# Altium PCB eciot-2.4G-PCB-ANT.PcbDoc
Units mm, origin at the board's own origin, x right, y up, seen from the top; angles counter-clockwise.
Board outline 106 x 76.82 mm, 2 copper layers (Top Layer, Bottom Layer); 25 components, 0 nets, 142 pads, 20 vias.
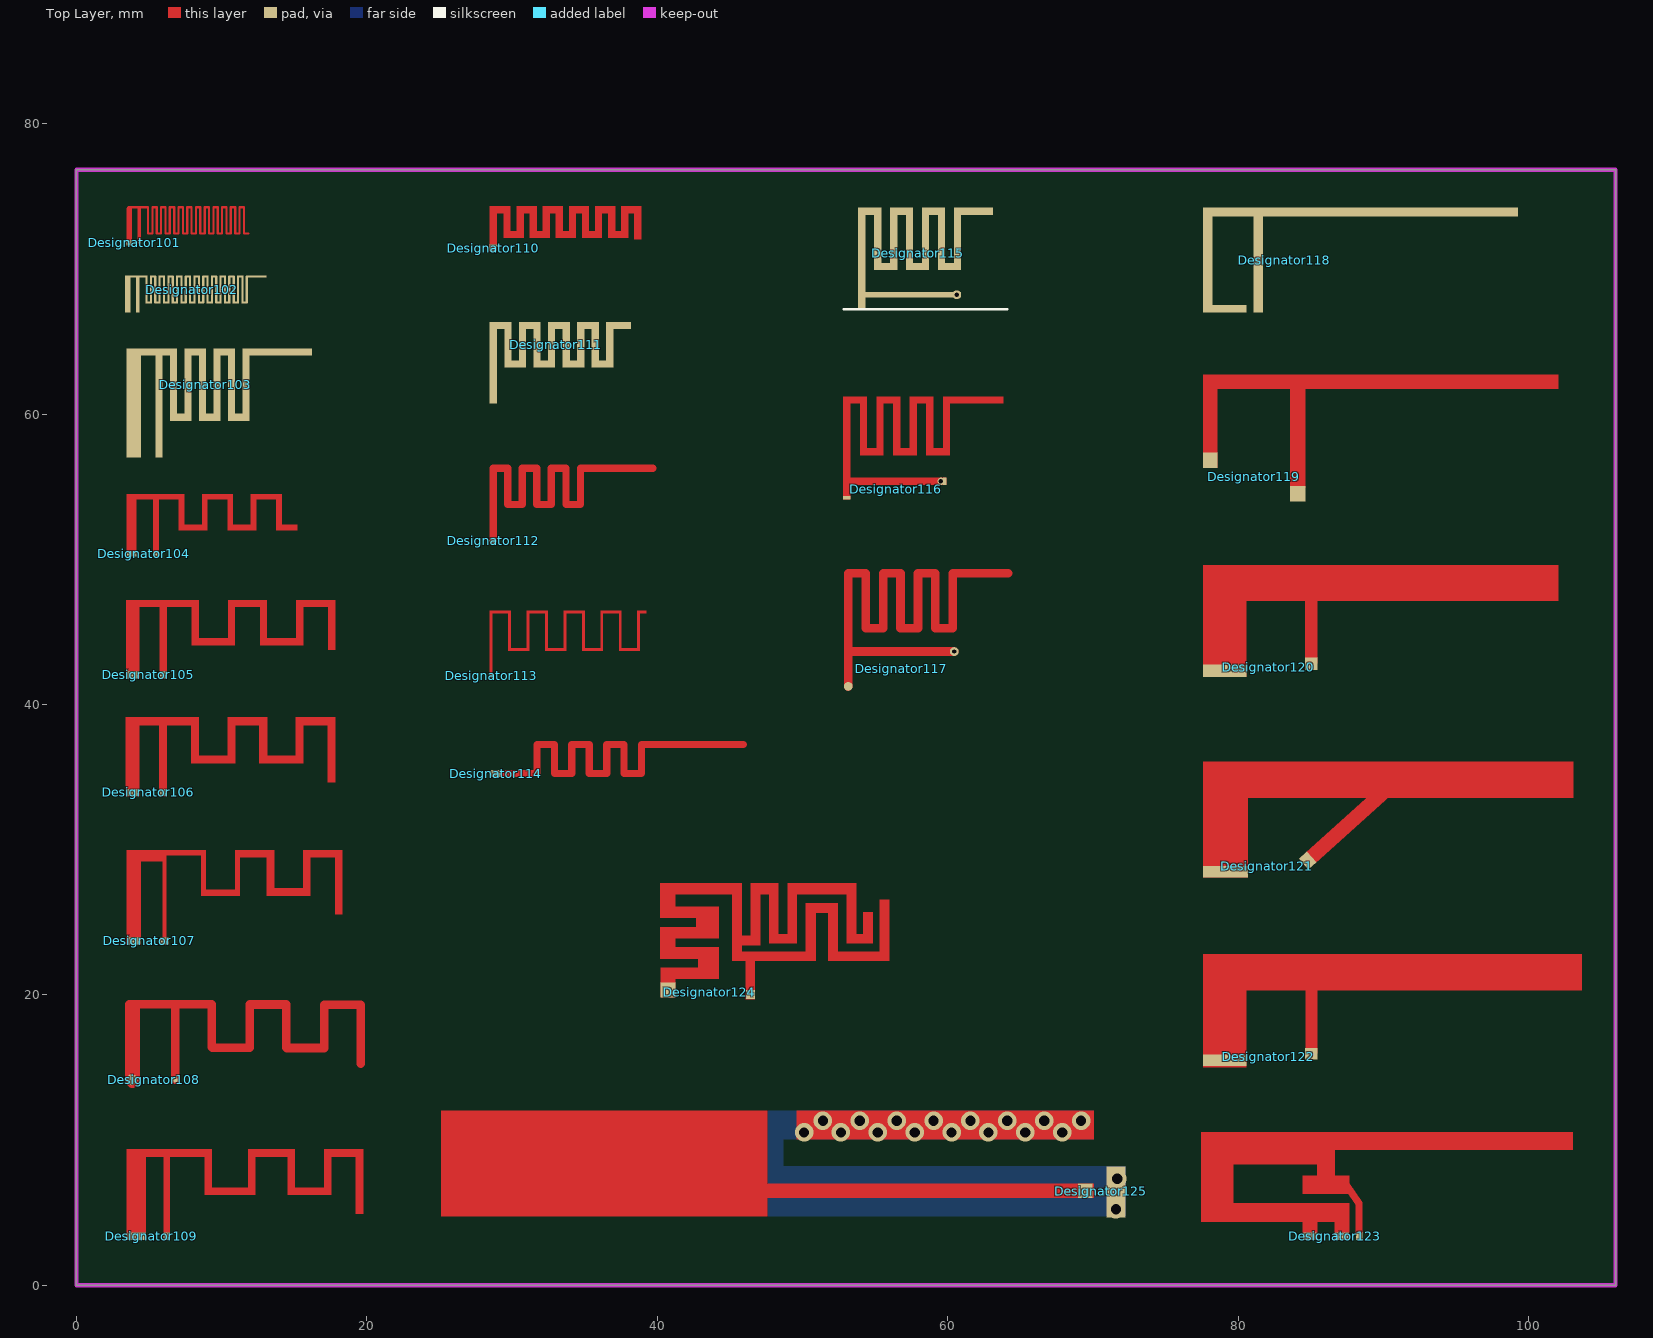
[diagram p0: Top Layer view]
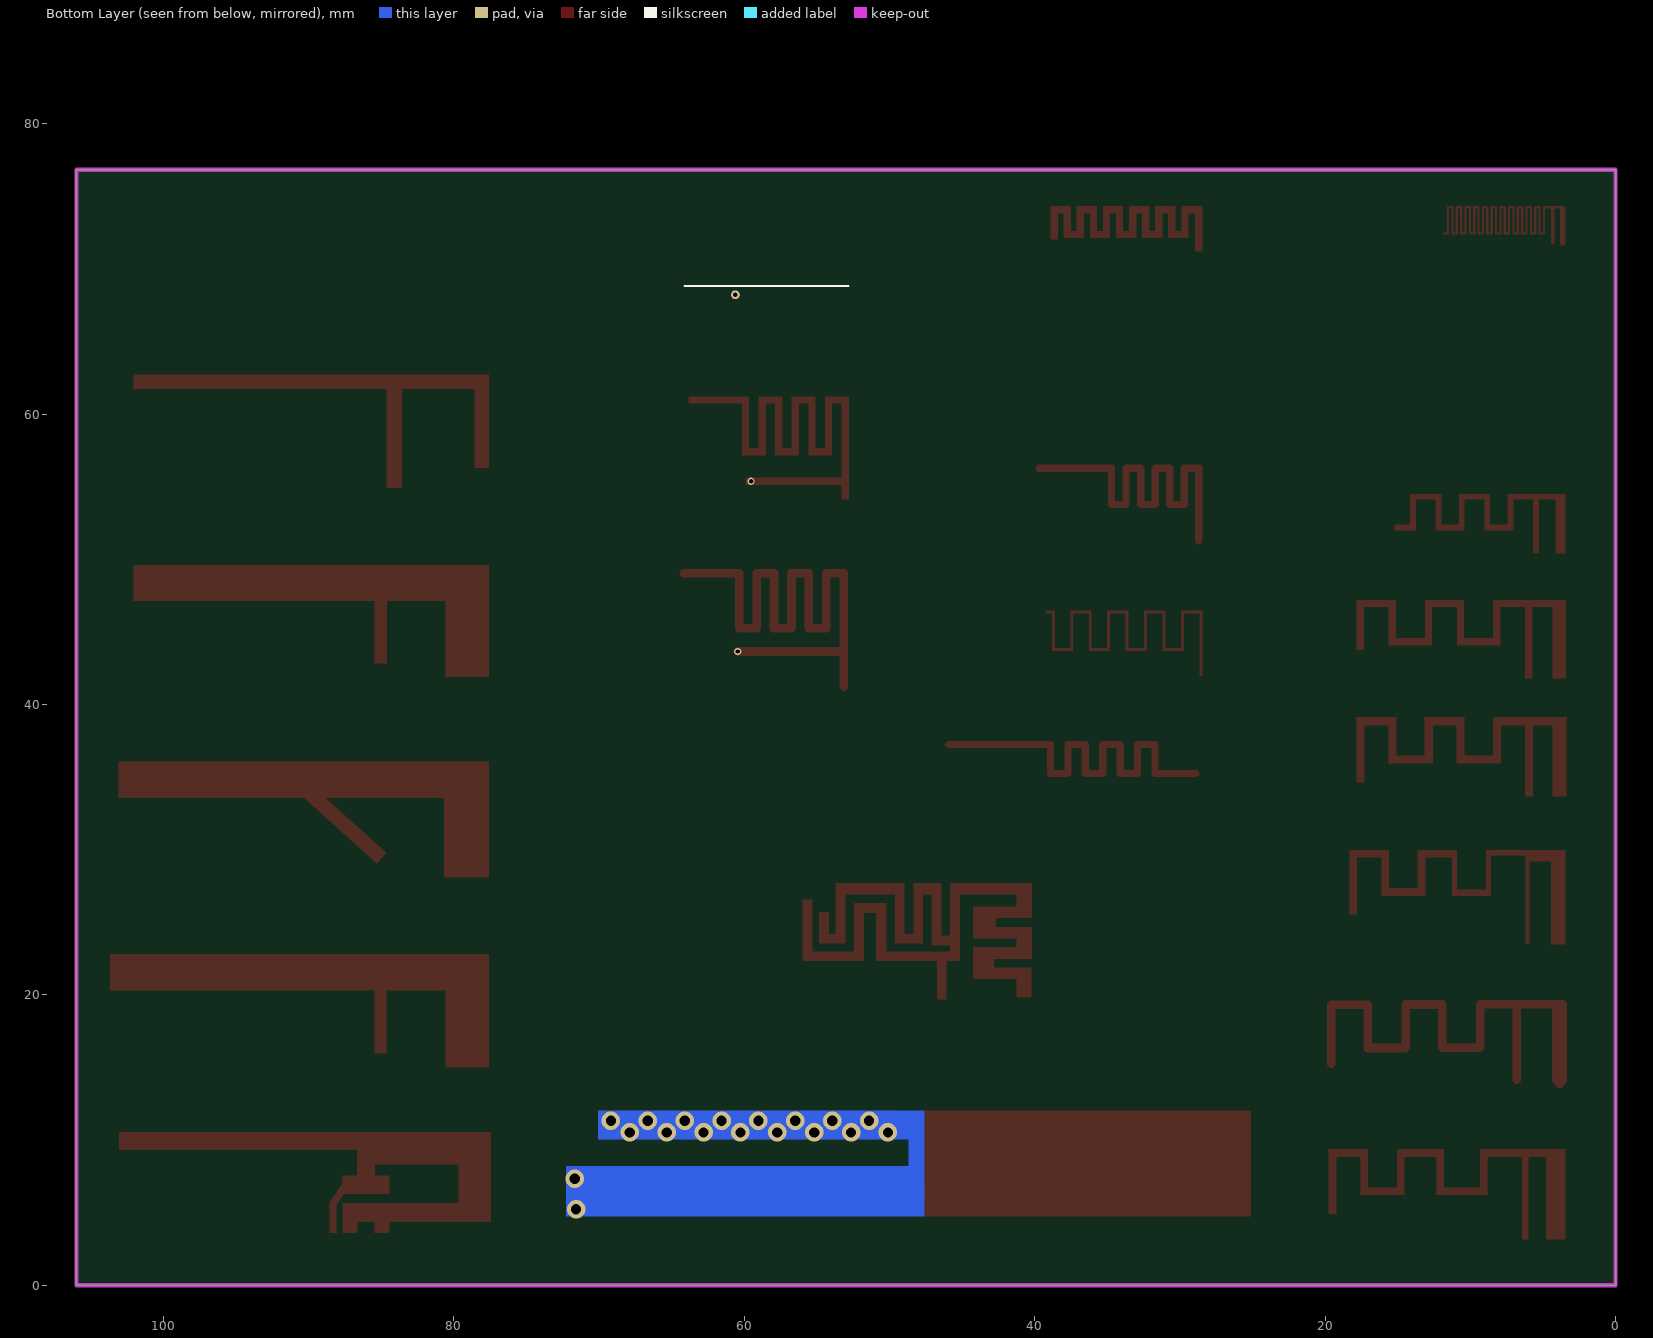
[diagram p1: Bottom Layer view, seen from below]

## Layer stack, top to bottom
Top Solder: solder mask 0.0102, Solder Resist, Dk 3.5
Top Layer: signal copper 0.0356
Dielectric 1: dielectric 0.32, FR-4, Dk 4.8
Bottom Layer: signal copper 0.0356
Bottom Solder: solder mask 0.0102, Solder Resist, Dk 3.5

## Board outline
0,0 0,76.82 106,76.82 106,0

## Design rules (kind name [scope] priority, off if disabled: settings)
Clearance [All] p1: gap=0.254 ignorepadtopadclearanceinfootprint=FALSE except(0: Arc-Hole Track-Hole SMDPad-Hole THPad-Hole Via-Hole Fill-Hole Poly-Hole Region-Hole Text-Hole)
PolygonConnect [All] p1: connectstyle=Relief reliefconductorwidth=0.254 reliefentries=4 polygonreliefangle="90 Angle" airgapwidth=0.254
RoutingVias [All] p1: holewidth=0.711 width=1.27 viastyle="Through Hole" minholewidth=0.711 minwidth=1.27 maxholewidth=0.711 maxwidth=1.27
SolderMaskExpansion [All] p1: expansion=0.102
Width [All] p1: maxlimit=0.254 minlimit=0.254 preferedwidth=0.254
30 further rules are at their usual default settings.

## Components (designator, comment, footprint, x,y, rotation, side; value= is the part's Value field where it differs from the comment)
Designator101 "Comment" EC-2.4G-PCB-ANT-TYPE1-1 4.33,71.82 r0 top
Designator102 "Comment" EC-2.4G-PCB-ANT-TYPE1-2 4.228,68.27 r0 top
Designator103 "Comment" EC-2.4G-PCB-ANT-TYPE1-3 5.68,60.77 r0 top
Designator104 "Comment" EC-2.4G-PCB-ANT-TYPE1-4 5.47,50.38 r0 top
Designator105 "Comment" EC-2.4G-PCB-ANT-TYPE1-5 5.977,42.046 r0 top
Designator106 "Comment" EC-2.4G-PCB-ANT-TYPE1-6 5.98,33.94 r0 top
Designator107 "Comment" EC-2.4G-PCB-ANT-TYPE1-7 6.066,23.73 r0 top
Designator108 "Comment" EC-2.4G-PCB-ANT-TYPE1-8 6.808,14.15 r0 top
Designator109 "Comment" EC-2.4G-PCB-ANT-TYPE1-9 6.224,3.37 r0 top
Designator110 "Comment" EC-2.4G-PCB-ANT-TYPE2-1 28.708,71.433 r0 top
Designator111 "Comment" EC-2.4G-PCB-ANT-TYPE2-2 28.708,63.512 r0 top
Designator112 "Comment" EC-2.4G-PCB-ANT-TYPE2-3 28.708,51.26 r0 top
Designator113 "Comment" EC-2.4G-PCB-ANT-TYPE2-4 28.558,41.97 r0 top
Designator114 "Comment" EC-2.4G-PCB-ANT-TYPE2-5 28.89,35.24 r0 top
Designator115 "Comment" EC-2.4G-PCB-ANT-TYPE3-1 54.08,70.713 r0 top
Designator116 "Comment" EC-2.4G-PCB-ANT-TYPE3-2 53.06,54.23 r0 top
Designator117 "Comment" EC-2.4G-PCB-ANT-TYPE3-3 53.157,41.24 r0 top
Designator118 "Comment" EC-2.4G-PCB-ANT-TYPE4-1 81.393,70.476 r0 top
Designator119 "Comment" EC-2.4G-PCB-ANT-TYPE4-2 84.1,54.509 r0 top
Designator120 "Comment" EC-2.4G-PCB-ANT-TYPE4-3 85.055,42.81 r0 top
Designator121 "Comment" EC-2.4G-PCB-ANT-TYPE4-4 84.794,29.26 r0 top
Designator122 "Comment" EC-2.4G-PCB-ANT-TYPE4-5 85.054,15.94 r0 top
Designator123 "Comment" EC-2.4G-PCB-ANT-TYPE4-6 88.338,3.37 r0 top
Designator124 "Comment" EC-2.4G-PCB-ANT-TYPE5-1 46.415,20.015 r0 top
Designator125 "Comment" EC-2.4G-PCB-ANT-TYPE5-2 69.49,6.52 r0 top

## Footprints (in the part's own frame and the unit in brackets; to place one, negate y for a bottom-side part, rotate by r counter-clockwise, add the part's x,y. Pads: shape width x height; smd on the part's side, far side on the other; paste and mask are expansions set on the pad)
EC-2.4G-PCB-ANT-TYPE1-1 [mm]
  rect 0.15x0.15 smd paste-1: 1(0,0)
  rect 0.4x0.4 smd paste-1: 2(-0.7,-0.03)
  Top Layer region: -0.501,2.401 -0.553,2.401 -0.553,2.257 -0.501,2.257
  Top Layer lines w0.15: -0.7,2.42 0,2.42 0.6,2.42 0.6,0.62 0.9,0.62 0.9,2.42 1.2,2.42 1.2,0.62 1.5,0.62 1.5,2.42 1.8,2.42 1.8,0.62 2.1,0.62 2.1,2.42 2.4,2.42 2.4,0.62 2.7,0.62 2.7,2.42 3,2.42 3,0.62 3.3,0.62 3.3,2.42 3.6,2.42 3.6,0.62 3.9,0.62 3.9,2.42 4.2,2.42 4.2,0.62 4.5,0.62 4.5,2.42 4.8,2.42 4.8,0.62 5.1,0.62 5.1,2.42 5.4,2.42 5.4,0.62 5.7,0.62 5.7,2.42 6,2.42 6,0.62 6.3,0.62 6.3,2.42 6.6,2.42 6.6,0.62 6.9,0.62 6.9,2.42 7.2,2.42 7.2,0.62 7.5,0.62
  Top Layer lines w0.25: 0,0 0,0.145 0,0.423 0,2.37
  Top Layer lines w0.4: -0.7,-0.03 -0.7,2.295
EC-2.4G-PCB-ANT-TYPE1-2 [mm]
  rect 0.25x2.55 smd paste+0 mask+0.102: 1(0,0)
  oval 0.8x0.15 smd paste+0 mask+0.102: 1(0.275,1.2)
  oval 0.15x1.95 smd paste+0 mask+0.102: 1(0.6,0.3) 1(0.9,0.3) 1(1.2,0.3) 1(1.5,0.3) 1(1.8,0.3) 1(2.1,0.3) 1(2.4,0.3) 1(2.7,0.3) 1(3,0.3) 1(3.3,0.3) 1(3.6,0.3) 1(3.9,0.3) 1(4.2,0.3) 1(4.5,0.3) 1(4.8,0.3) 1(5.1,0.3) 1(5.4,0.3) 1(5.7,0.3) 1(6,0.3) 1(6.3,0.3) 1(6.6,0.3) 1(6.9,0.3) 1(7.2,0.3) 1(7.5,0.3)
  oval 0.45x0.15 smd paste+0 mask+0.102: 1(0.75,-0.6) 1(1.05,1.2) 1(1.35,-0.6) 1(1.65,1.2) 1(1.95,-0.6) 1(2.25,1.2) 1(2.55,-0.6) 1(2.85,1.2) 1(3.15,-0.6) 1(3.45,1.2) 1(3.75,-0.6) 1(4.05,1.2) 1(4.35,-0.6) 1(4.65,1.2) 1(4.95,-0.6) 1(5.25,1.2) 1(5.55,-0.6) 1(5.85,1.2) 1(6.15,-0.6) 1(6.45,1.2) 1(6.75,-0.6) 1(7.05,1.2) 1(7.35,-0.6)
  oval 1.45x0.15 smd mask+0.102: 1(8.15,1.2)
  rect 0.4x2.55 smd paste+0 mask+0.102: 2(-0.7,0)
  oval 1.025x0.15 smd mask+0.102: 2(-0.388,1.2)
EC-2.4G-PCB-ANT-TYPE1-3 [mm]
  rect 0.5x7.5 smd: 1(0,0)
  rect 1x7.5 smd: 2(-1.75,0)
  rect 3.5x0.5 smd: 2(-0.5,3.5)
  rect 0.5x5 smd: 2(1,1.25) 2(2,1.25) 2(3,1.25) 2(4,1.25) 2(5,1.25) 2(6,1.25)
  rect 1.5x0.5 smd: 2(1.5,-1) 2(2.5,3.5) 2(3.5,-1) 2(4.5,3.5) 2(5.5,-1)
  rect 4.8x0.5 smd: 2(8.15,3.5)
EC-2.4G-PCB-ANT-TYPE1-4 [mm]
  rect 0.4x0.4 smd paste-2: 1(0,0)
  rect 0.72x0.4 smd paste-2: 2(-1.68,0)
  Top Layer region: 8.28,1.608 9.751,1.608 9.751,2.008 8.28,2.008
  Top Layer region: 3.16,3.72 5.32,3.72 5.32,4.12 3.16,4.12
  Top Layer region: 3.16,1.608 3.56,1.608 3.56,4.12 3.16,4.12
  Top Layer region: 1.56,1.608 3.56,1.608 3.56,2.008 1.56,2.008
  Top Layer region: -0.2,0 0.2,0 0.2,3.92 -0.2,3.92
  Top Layer region: -2.04,3.72 1.96,3.72 1.96,4.12 -2.04,4.12
  Top Layer region: -2.04,0 -1.32,0 -1.32,3.877 -2.04,3.877
  Top Layer region: 1.56,1.608 1.96,1.608 1.96,4.12 1.56,4.12
  Top Layer region: 4.92,1.608 5.32,1.608 5.32,4.12 4.92,4.12
  Top Layer region: 4.92,1.608 6.92,1.608 6.92,2.008 4.92,2.008
  Top Layer region: 6.52,1.608 6.92,1.608 6.92,4.12 6.52,4.12
  Top Layer region: 6.52,3.72 8.68,3.72 8.68,4.12 6.52,4.12
  Top Layer region: 8.28,1.608 8.68,1.608 8.68,4.12 8.28,4.12
EC-2.4G-PCB-ANT-TYPE1-5 [mm]
  rect 0.5x0.5 smd paste-2: 1(0,0)
  rect 0.9x0.5 smd paste-2: 2(-2.097,0.004)
  Top Layer region: -2.549,4.655 2.45,4.655 2.45,5.155 -2.549,5.155
  Top Layer region: -0.25,-0.246 0.25,-0.246 0.25,5.08 -0.25,5.08
  Top Layer region: 1.95,2.014 2.45,2.014 2.45,5.08 1.95,5.08
  Top Layer region: 2.031,2.014 4.825,2.014 4.825,2.514 2.031,2.514
  Top Layer region: 4.45,2.014 4.95,2.014 4.95,5.08 4.45,5.08
  Top Layer region: 4.45,4.655 7.15,4.655 7.15,5.155 4.45,5.155
  Top Layer region: 6.65,2.014 7.15,2.014 7.15,5.08 6.65,5.08
  Top Layer region: 6.73,2.014 9.524,2.014 9.524,2.514 6.73,2.514
  Top Layer region: 9.15,2.014 9.65,2.014 9.65,5.08 9.15,5.08
  Top Layer region: 9.15,4.655 11.85,4.655 11.85,5.155 9.15,5.155
  Top Layer region: 11.35,1.714 11.85,1.714 11.85,5.08 11.35,5.08
  Top Layer region: -2.549,-0.246 -1.649,-0.246 -1.649,5.08 -2.549,5.08
EC-2.4G-PCB-ANT-TYPE1-6 [mm]
  rect 0.5x0.5 smd: 1(0,0)
  rect 0.9x0.5 smd: 2(-2.1,0)
  Top Layer region: -2.575,5.165 -2.575,-0.25 -1.65,-0.25 -1.65,4.64 -0.276,4.64 -0.276,-0.25 0.25,-0.25 0.25,4.64 1.925,4.64 1.925,2 4.95,2 4.95,4.64 6.624,4.64 6.624,2 9.65,2 9.65,2 9.65,2 9.65,4.64 11.324,4.64 11.324,4.64 11.324,4.64 11.324,4.64 11.324,0.7 11.324,0.7 11.324,0.7 11.85,0.7 11.85,0.715 11.85,0.716 11.85,0.716 11.85,5.163 11.848,5.165 9.125,5.165 9.125,2.525 7.15,2.525 7.15,5.165 4.425,5.165 4.425,2.525 2.45,2.525 2.45,5.165
EC-2.4G-PCB-ANT-TYPE1-7 [mm]
  rect 0.6x0.5 smd paste-2: 1(0,0)
  rect 1.017x0.5 smd paste-2: 2(-2.127,0)
  Top Layer region: 9.538,5.729 12.263,5.729 12.263,6.255 9.538,6.255
  Top Layer region: 9.538,3.09 10.061,3.09 10.061,6.255 9.538,6.255
  Top Layer region: 4.842,5.729 7.562,5.729 7.562,6.255 4.842,6.255
  Top Layer region: 4.842,3.09 5.197,3.09 5.197,6.255 4.842,6.255
  Top Layer region: 2.72,3.09 5.197,3.09 5.197,3.515 2.72,3.515
  Top Layer region: -2.635,-0.252 -1.62,-0.252 -1.62,6.255 -2.635,6.255
  Top Layer region: -0.152,-0.245 0.152,-0.245 0.152,6.255 -0.152,6.255
  Top Layer region: -2.635,5.447 0.152,5.447 0.152,6.255 -2.635,6.255
  Top Layer region: -0.102,5.875 2.863,5.875 2.863,6.255 -0.102,6.255
  Top Layer region: 2.508,3.09 2.863,3.09 2.863,6.255 2.508,6.255
  Top Layer region: 7.036,3.09 7.562,3.09 7.562,6.255 7.036,6.255
  Top Layer region: 7.036,3.09 10.061,3.09 10.061,3.616 7.036,3.616
  Top Layer region: 11.737,1.789 12.263,1.789 12.263,6.255 11.737,6.255
EC-2.4G-PCB-ANT-TYPE1-8 [mil]
  round 15 smd: 1(0,0)
  round 30 smd: 2(-118,0)
  Top Layer lines w23.62: -124,0.13 -124,205 -108,205 ; -124,3.53 ccw(c-104.47,3.53) -118.28,-10.28 ; -124,6.46 ccw(c-105.32,6.46) -118.53,-6.75 ; -115.72,-10.28 ccw(c-134.36,8.36) -108,8.36 ; -113.47,-6.75 ccw(c-126.68,6.46) -108,6.46 ; -108,0.13 -108,205 ; 0,0.13 0,205 ; 99,88 99,205 0,205 ; 101,87 202,87 202,204 301,204 301,87 ; 303,86 404,86 404,203 503,203 503,44 ; -108,205 0,205
EC-2.4G-PCB-ANT-TYPE1-9 [mm]
  rect 0.45x0.5 smd paste-2: 1(0,0)
  rect 1.354x0.5 smd paste-2: 2(-2.117,0)
  Top Layer region: -0.225,-0.238 0.225,-0.238 0.225,6.001 -0.225,6.001
  Top Layer region: -2.794,-0.219 -1.44,-0.219 -1.44,6.001 -2.794,6.001
  Top Layer region: -2.794,5.475 -0.006,5.475 -0.006,6.001 -2.794,6.001
  Top Layer region: -0.018,5.475 3.117,5.475 3.117,6.001 -0.018,6.001
  Top Layer region: 2.591,2.836 3.117,2.836 3.117,6.001 2.591,6.001
  Top Layer region: 2.591,2.836 6.124,2.836 6.124,3.362 2.591,3.362
  Top Layer region: 5.598,2.836 6.124,2.836 6.124,6.001 5.598,6.001
  Top Layer region: 5.598,5.475 8.832,5.475 8.832,6.001 5.598,6.001
  Top Layer region: 8.306,2.836 8.832,2.836 8.832,6.001 8.306,6.001
  Top Layer region: 8.306,2.836 11.331,2.836 11.331,3.362 8.306,3.362
  Top Layer region: 10.808,2.836 11.331,2.836 11.331,6.001 10.808,6.001
  Top Layer region: 10.808,5.475 13.533,5.475 13.533,6.001 10.808,6.001
  Top Layer region: 13.007,1.535 13.533,1.535 13.533,6.001 13.007,6.001
EC-2.4G-PCB-ANT-TYPE2-1 [mm]
  rect 0.5x0.5 smd: 1(0,0)
  Top Layer region: 3.9,2.882 3.4,2.882 3.4,0.682 3.9,0.682
  Top Layer region: 8.8,2.882 8.8,2.382 10.2,2.382 10.2,2.882
  Top Layer region: 7,2.882 7,2.382 8.4,2.382 8.4,2.882
  Top Layer region: 9.3,2.882 8.8,2.882 8.8,0.682 9.3,0.682
  Top Layer region: 8.4,2.882 7.9,2.882 7.9,0.682 8.4,0.682
  Top Layer region: 7.5,2.882 7,2.882 7,0.682 7.5,0.682
  Top Layer region: 5.2,2.882 5.2,2.382 6.6,2.382 6.6,2.882
  Top Layer region: 6.6,2.882 6.1,2.882 6.1,0.682 6.6,0.682
  Top Layer region: 3.4,2.882 3.4,2.382 4.8,2.382 4.8,2.882
  Top Layer region: 10.2,2.882 9.7,2.882 9.7,0.582 10.2,0.582
  Top Layer region: 5.7,2.882 5.2,2.882 5.2,0.682 5.7,0.682
  Top Layer region: 7.9,1.182 7.9,0.682 9.3,0.682 9.3,1.182
  Top Layer region: 6.1,1.182 6.1,0.682 7.5,0.682 7.5,1.182
  Top Layer region: 4.8,2.882 4.3,2.882 4.3,0.682 4.8,0.682
  Top Layer region: 4.3,1.182 4.3,0.682 5.7,0.682 5.7,1.182
  Top Layer region: 1.6,2.882 1.6,2.382 3,2.382 3,2.882
  Top Layer region: 2.1,2.882 1.6,2.882 1.6,0.682 2.1,0.682
  Top Layer region: 2.5,1.182 2.5,0.682 3.9,0.682 3.9,1.182
  Top Layer region: 3,2.882 2.5,2.882 2.5,0.682 3,0.682
  Top Layer region: 1.2,2.882 0.7,2.882 0.7,0.682 1.2,0.682
  Top Layer region: -0.25,-0.25 0.25,-0.25 0.25,2.882 -0.25,2.882
  Top Layer region: 0.7,1.182 0.7,0.682 2.1,0.682 2.1,1.182
  Top Layer region: -0.25,2.882 -0.25,2.382 1.2,2.382 1.2,2.882
EC-2.4G-PCB-ANT-TYPE2-2 [mm]
  rect 0.5x5.58 smd: 1(0,0)
  rect 1.5x0.5 smd: 1(0.5,2.587) 1(1.507,-0.062) 1(2.512,2.585) 1(3.512,-0.062) 1(4.517,2.587) 1(5.52,-0.063) 1(6.517,2.587) 1(7.517,-0.068)
  rect 0.5x3.15 smd: 1(1.007,1.263) 1(2.01,1.26) 1(3.012,1.262) 1(4.012,1.262) 1(5.02,1.262) 1(6.017,1.262) 1(7.017,1.262) 1(8.017,1.255)
  rect 1.702x0.5 smd: 1(8.619,2.581)
EC-2.4G-PCB-ANT-TYPE2-3 [mm]
  round 0.5 smd: 1(0,0)
  Top Layer lines w0.5: 0,0 0,5 1,5 1,2.5 2,2.5 2,4.96 ; 2,5 3,5 3,2.5 4,2.5 4,4.99 ; 4,5 5,5 5,2.5 6,2.5 6,5 11,5
EC-2.4G-PCB-ANT-TYPE2-4 [mm]
  rect 0.2x0.2 smd paste-2: 1(0,0)
  Top Layer region: 10.061,4.3 10.698,4.3 10.698,4.5 10.061,4.5
  Top Layer region: 10.261,1.72 10.261,4.5 10.061,4.5 10.061,1.72
  Top Layer region: 8.791,1.72 10.261,1.72 10.261,1.92 8.791,1.92
  Top Layer region: 8.991,1.72 8.991,4.5 8.791,4.5 8.791,1.72
  Top Layer region: 7.521,4.3 8.991,4.3 8.991,4.5 7.521,4.5
  Top Layer region: 7.721,1.72 7.721,4.5 7.521,4.5 7.521,1.72
  Top Layer region: 6.251,1.72 7.721,1.72 7.721,1.92 6.251,1.92
  Top Layer region: 6.451,1.72 6.451,4.5 6.251,4.5 6.251,1.72
  Top Layer region: 4.981,4.3 6.451,4.3 6.451,4.5 4.981,4.5
  Top Layer region: 5.181,1.72 5.181,4.5 4.981,4.5 4.981,1.72
  Top Layer region: 3.711,1.72 5.181,1.72 5.181,1.92 3.711,1.92
  Top Layer region: 3.911,1.72 3.911,4.5 3.711,4.5 3.711,1.72
  Top Layer region: 2.441,4.3 3.911,4.3 3.911,4.5 2.441,4.5
  Top Layer region: 2.641,1.72 2.641,4.5 2.441,4.5 2.441,1.72
  Top Layer region: 1.171,1.72 2.641,1.72 2.641,1.92 1.171,1.92
  Top Layer region: 1.371,1.72 1.371,4.5 1.171,4.5 1.171,1.72
  Top Layer region: -0.099,4.3 1.371,4.3 1.371,4.5 -0.099,4.5
  Top Layer region: 0.101,0 0.101,4.5 -0.099,4.5 -0.099,0
EC-2.4G-PCB-ANT-TYPE2-5 [mm]
  oval 0.864x0.5 smd: 1(0,0)
  Top Layer lines w0.5: 0,0 2.825,0 2.825,2 4.025,2 4.025,0 5.225,0 5.225,2 6.425,2 6.425,0 7.625,0 7.625,2 8.825,2 8.825,0 10.025,0 10.025,2 17.025,2
EC-2.4G-PCB-ANT-TYPE3-1 [mm]
  rect 0.5x7 smd paste+0 mask+0.102: 1(0,0)
  rect 1.6x0.5 smd paste+0 mask+0.102: 1(0.55,3.25) 1(1.65,-0.55) 1(2.75,3.25) 1(3.85,-0.55) 1(4.95,3.25) 1(6.05,-0.55)
  rect 0.5x4.3 smd paste+0 mask+0.102: 1(1.1,1.35) 1(2.2,1.35) 1(3.3,1.35) 1(4.4,1.35) 1(5.5,1.35) 1(6.6,1.35)
  rect 2.7x0.5 smd paste+0 mask+0.102: 1(7.7,3.25)
  rect 7.1x0.4 smd paste+0 mask+0.102: 2(3.3,-2.5)
  round 0.61 hole 0.305 unplated paste+0 mask+0.102: 2(6.54,-2.5)
  silkscreen extent -1.25,-3.5 10.05,-3.5
EC-2.4G-PCB-ANT-TYPE3-2 [mil]
  rect 20x10 smd paste-20 mask+2: 1(0,0)
  rect 10x20 smd paste-20 mask+2: 2(265,45)
  Top Layer region: -10,-5 10,-5 10,275 -10,275
  Top Layer region: -10,255 55,255 55,275 -10,275
  Top Layer region: 35,115 55,115 55,265 35,265
  Top Layer region: 35,115 100,115 100,135 35,135
  Top Layer region: 80,115 100,115 100,275 80,275
  Top Layer region: 170,255 235,255 235,275 170,275
  Top Layer region: 170,115 190,115 190,275 170,275
  Top Layer region: 125,115 145,115 145,275 125,275
  Top Layer region: 85,255 145,255 145,275 85,275
  Top Layer region: 125,115 190,115 190,135 125,135
  Top Layer region: 215,115 280,115 280,135 215,135
  Top Layer region: 215,115 235,115 235,275 215,275
  Top Layer region: 260,115 280,115 280,275 260,275
  Top Layer region: 260,255 425,255 425,275 260,275
  Top Layer region: -10,35 270,35 270,55 -10,55
EC-2.4G-PCB-ANT-TYPE3-3 [mm]
  round 0.6 smd: 1(0,0) 2(7.3,2.4)
  Top Layer lines w0.6: 0,0 0,7.8 1.2,7.8 1.2,4 2.4,4 2.4,7.8 3.6,7.8 3.6,4 4.8,4 4.8,7.8 6,7.8 6,4 7.2,4 7.2,7.8 11,7.8 ; 0,2.4 7.3,2.4
EC-2.4G-PCB-ANT-TYPE4-1 [mm]
  rect 0.65x7 smd: 1(0,0)
  rect 0.64x7.2 smd: 2(-3.487,0.137)
  rect 3x0.5 smd: 2(-2.311,-3.226)
  rect 21.7x0.6 smd: 2(7.037,3.437)
EC-2.4G-PCB-ANT-TYPE4-2 [mil]
  rect 42x42 smd: 1(0,0)
  rect 39.37x42 smd: 2(-237,90.98)
  Top Layer region: -256.69,283.58 707.88,283.58 707.88,322.95 -256.69,322.95
  Top Layer region: -21,15 21,15 21,322.95 -21,322.95
  Top Layer region: -256.68,70 -217.32,70 -217.32,322.95 -256.68,322.95
EC-2.4G-PCB-ANT-TYPE4-3 [mil]
  rect 34x34 smd: 1(0,0)
  rect 118.11x34 smd: 2(-235.24,-19.25)
  Top Layer region: 670.28,267.86 -294.29,267.86 -294.29,169.43 670.28,169.43
  Top Layer region: 17,267.86 -17,267.86 -17,0.14 17,0.14
  Top Layer region: -176.18,267.86 -294.29,267.86 -294.29,-36.28 -176.18,-36.28
EC-2.4G-PCB-ANT-TYPE4-4 [mil]
  rect 39.37x30 smd rot 132: 1(0,0)
  rect 122.01x30 smd: 2(-223,-30.98)
  Top Layer region: -162,268 -284,268 -284,-46 -162,-46
  Top Layer region: 720.65,267.8 -283.29,267.8 -283.29,169.37 720.65,169.37
  Top Layer region: 224.37,175.37 197.91,204.76 -6.34,20.86 20.12,-8.53
EC-2.4G-PCB-ANT-TYPE4-5 [mm]
  rect 0.85x0.8 smd: 1(0,0)
  rect 3x0.8 smd: 2(-5.974,-0.438)
  Top Layer region: -7.473,-0.94 -4.473,-0.94 -4.473,6.86 -7.473,6.86
  Top Layer region: -7.474,4.369 18.626,4.369 18.626,6.869 -7.474,6.869
  Top Layer region: -0.424,0 0.426,0 0.426,5.558 -0.424,5.558
  Top Layer lines w0.254: -5.974,0.327 -5.974,0.569
EC-2.4G-PCB-ANT-TYPE4-6 [mm]
  rect 0.46x0.5 smd: 1(0,0)
  rect 1x0.5 smd: 2(-3.38,0) 2(-1.18,0)
  Top Layer region: -10.86,0.99 -10.86,7.16 14.72,7.16 14.72,5.95 -1.68,5.95 -1.68,4.15 -0.68,4.15 -0.68,3.648 0.23,2.328 0.23,0.25 -0.23,0.25 -0.23,2.185 -0.751,2.94 -3.88,2.94 -3.88,4.15 -2.88,4.15 -2.88,4.95 -8.68,4.95 -8.68,2.28 -0.68,2.28 -0.68,0.25 -1.68,0.25 -1.68,0.99 -2.88,0.99 -2.88,0.25 -3.88,0.25 -3.88,0.99
EC-2.4G-PCB-ANT-TYPE5-1 [mm]
  rect 0.63x0.63 smd: 1(0,0)
  rect 1.02x1.02 smd: 2(-5.675,0.325)
  Top Layer region: -0.315,-0.315 -0.315,2.315 0.315,2.315 0.315,-0.315
  Top Layer region: -6.185,-0.185 -6.185,1.085 -5.165,1.085 -5.165,-0.185
  Top Layer region: -6.185,1.085 -6.185,1.085 -2.195,1.085 -5.165,1.085
  Top Layer region: -6.185,1.085 -6.185,1.845 -2.195,1.845 -2.195,1.085
  Top Layer region: -6.185,1.845 -3.585,1.845 -2.195,1.845 -2.195,1.845
  Top Layer region: -0.315,2.315 -0.315,2.315 4.505,2.315 0.315,2.315
  Top Layer region: -0.315,2.315 -1.235,2.315 4.505,2.315 4.505,2.315
  Top Layer region: 9.555,2.335 5.375,2.335 9.555,2.335
  Top Layer region: -3.585,1.845 -3.585,2.475 -2.195,2.475 -2.195,1.845
  Top Layer region: -3.585,2.475 -6.195,2.475 -2.195,2.475 -2.195,2.475
  Top Layer region: -1.235,2.315 -1.235,2.955 4.505,2.955 4.505,2.315
  Top Layer region: 5.375,2.335 5.375,2.955 9.555,2.955 9.555,2.335
  Top Layer region: -0.605,2.955 3.805,2.955 4.505,2.955 4.505,2.955
  Top Layer region: 6.025,2.955 8.915,2.955 9.555,2.955 9.555,2.955
  Top Layer region: -6.195,2.475 -6.195,3.245 -2.195,3.245 -2.195,2.475
  Top Layer region: -6.195,3.245 -6.195,3.245 -5.175,3.245 -2.195,3.245
  Top Layer region: -1.235,2.955 -1.235,3.395 -0.605,3.395 -0.605,2.955
  Top Layer region: -1.235,3.395 -1.235,3.395 0.665,3.395 -0.605,3.395
  Top Layer region: 3.205,3.525 1.305,3.525 3.205,3.525
  Top Layer region: 8.415,3.525 6.635,3.525 8.415,3.525
  Top Layer region: -6.195,3.245 -6.195,3.875 -5.175,3.875 -5.175,3.245
  Top Layer region: -6.195,3.875 -6.195,3.875 -2.195,3.875 -5.175,3.875
  Top Layer region: -1.235,3.395 -1.235,4.035 0.665,4.035 0.665,3.395
  Top Layer region: -0.605,4.035 0.035,4.035 0.665,4.035 0.665,4.035
  Top Layer region: 1.305,3.525 1.305,4.165 3.205,4.165 3.205,3.525
  Top Layer region: 6.635,3.525 6.635,4.165 8.415,4.165 8.415,3.525
  Top Layer region: 1.935,4.165 2.575,4.165 3.205,4.165 3.205,4.165
  Top Layer region: 7.275,4.165 7.775,4.165 8.415,4.165 8.415,4.165
  Top Layer region: -6.195,3.875 -6.195,4.645 -2.195,4.645 -2.195,3.875
  Top Layer region: -6.195,4.645 -3.715,4.645 -2.195,4.645 -2.195,4.645
  Top Layer region: -3.715,4.645 -3.715,5.275 -2.195,5.275 -2.195,4.645
  Top Layer region: -3.715,5.275 -6.195,5.275 -2.195,5.275 -2.195,5.275
  Top Layer region: 3.805,2.955 3.805,5.645 4.505,5.645 4.505,2.955
  Top Layer region: 3.805,5.645 3.805,5.645 5.375,5.645 4.505,5.645
  Top Layer region: 5.375,2.955 5.375,5.645 6.025,5.645 6.025,2.955
  Top Layer region: 7.775,4.165 7.775,5.685 8.415,5.685 8.415,4.165
  Top Layer region: 7.775,5.685 7.775,5.685 8.415,5.685
  Top Layer region: -6.195,5.275 -6.195,6.035 -2.195,6.035 -2.195,5.275
  Top Layer region: -6.195,6.035 -6.195,6.035 -5.175,6.035 -2.195,6.035
  Top Layer region: 3.805,5.645 3.805,6.295 6.025,6.295 6.025,5.645
  Top Layer region: 3.805,6.295 3.805,6.295 6.025,6.295
  Top Layer region: 8.915,2.955 8.915,6.525 9.555,6.525 9.555,2.955
  Top Layer region: 8.915,6.525 8.915,6.525 9.555,6.525
  Top Layer region: -6.195,6.035 -6.195,6.895 -5.175,6.895 -5.175,6.035
  Top Layer region: 0.035,4.035 0.035,6.895 0.665,6.895 0.665,4.035
  Top Layer region: 2.575,4.165 2.575,6.895 3.205,6.895 3.205,4.165
  Top Layer region: -6.195,6.895 -6.195,6.895 -1.235,6.895 -5.175,6.895
  Top Layer region: -1.235,4.035 -1.235,6.895 -0.605,6.895 -0.605,4.035
  Top Layer region: 0.035,6.895 0.035,6.895 1.305,6.895 0.665,6.895
  Top Layer region: 1.305,4.165 1.305,6.895 1.935,6.895 1.935,4.165
  Top Layer region: 2.575,6.895 2.575,6.895 6.635,6.895 3.205,6.895
  Top Layer region: 6.635,4.165 6.635,6.895 7.275,6.895 7.275,4.165
  Top Layer region: -6.195,6.895 -6.195,7.655 -0.605,7.655 -0.605,6.895
  Top Layer region: 0.035,6.895 0.035,7.655 1.935,7.655 1.935,6.895
  Top Layer region: 2.575,6.895 2.575,7.655 7.275,7.655 7.275,6.895
  Top Layer region: -6.195,7.655 -6.195,7.655 -0.605,7.655
  Top Layer region: 0.035,7.655 0.035,7.655 1.935,7.655
  Top Layer region: 2.575,7.655 2.575,7.655 7.275,7.655
EC-2.4G-PCB-ANT-TYPE5-2 [mm]
  rect 1x1 smd: 1(0,0)
  rect 1.3x3.5 smd: 2(2.1,-0.1)
  Top Layer region: 0.6,5.5 -19.9,5.5 -19.9,3.5 0.6,3.5
  Top Layer region: 0.6,0.5 -25.225,0.5 -25.225,-0.5 0.6,-0.5
  Top Layer region: -21.9,5.5 -44.4,5.5 -44.4,-1.8 -21.9,-1.8
  Bottom Layer region: 0.6,5.5 -20.8,5.5 -20.8,3.5 0.6,3.5
  Bottom Layer region: -20.8,5.5 -21.9,5.5 -21.9,1.2 -20.8,1.2
  Bottom Layer region: 2.8,1.7 -21.9,1.7 -21.9,-1.8 2.8,-1.8

## Via types
v1: diameter 1.27, hole 0.711, Top Layer to Bottom Layer, 18 vias
v2: diameter 0.5, hole 0.3, Top Layer to Bottom Layer, 2 vias

## Nets (pads, with @x,y where several pads share a name; then routed paths per layer and width w, separated by ;. In a path a pad name is that pad's centre, name@x,y a point inside that pad or via, vN(x,y) a via of type N, cw(c..) or ccw(c..) an arc to the next point about the centre after c; other vN are vias at no path point)
pads on no net: Designator101.1 Designator101.2 Designator102.1 Designator102.2 Designator103.1 Designator103.2 Designator104.1 Designator104.2 Designator105.1 Designator105.2 Designator106.1 Designator106.2 Designator107.1 Designator107.2 Designator108.1 Designator108.2 Designator109.1 Designator109.2 Designator110.1 Designator111.1 Designator112.1 Designator113.1 Designator114.1 Designator115.1 Designator115.2 Designator116.1 Designator116.2 Designator117.1 Designator117.2 Designator118.1 Designator118.2 Designator119.1 Designator119.2 Designator120.1 Designator120.2 Designator121.1 Designator121.2 Designator122.1 Designator122.2 Designator123.1 Designator123.2 Designator124.1 Designator124.2 Designator125.1 Designator125.2
copper on no net:
  other v1: 71.59,5.22 71.69,7.32 50.11,10.52 52.65,10.52 55.19,10.52 57.73,10.52 60.27,10.52 62.81,10.52 65.35,10.52 67.89,10.52 51.41,11.32 53.95,11.32 56.49,11.32 59.03,11.32 61.57,11.32 64.11,11.32 66.65,11.32 69.19,11.32
  other v2: 60.457,43.64 59.537,55.373

## Keep-outs
Keep-Out Layer:
  the board outline again, w0.3

## Text inside footprints (layer, text, board x,y; h text height)
Designator123: Mechanical 11 "3" at 84.878,3.37 h0.2; Mechanical 11 "2" at 87.078,3.37 h0.2; Mechanical 11 "1" at 88.259,3.37 h0.2; Mechanical 16 "2011-09-19" at 77.693,4.527 h0.2; Mechanical 16 "ROBERT MITAL" at 77.693,5.277 h0.2; Mechanical 16 "MICHAL BLACHUCKI" at 77.693,4.877 h0.2